# Altium PCB helix_4_multi_shield_host.PcbDoc (part 1 of 3)
Units mm, origin at the board's own origin, x right, y up, seen from the top; angles counter-clockwise.
Board outline 150 x 170 mm, 2 copper layers (Top Layer, Bottom Layer); 120 components, 166 nets, 674 pads, 2020 vias.
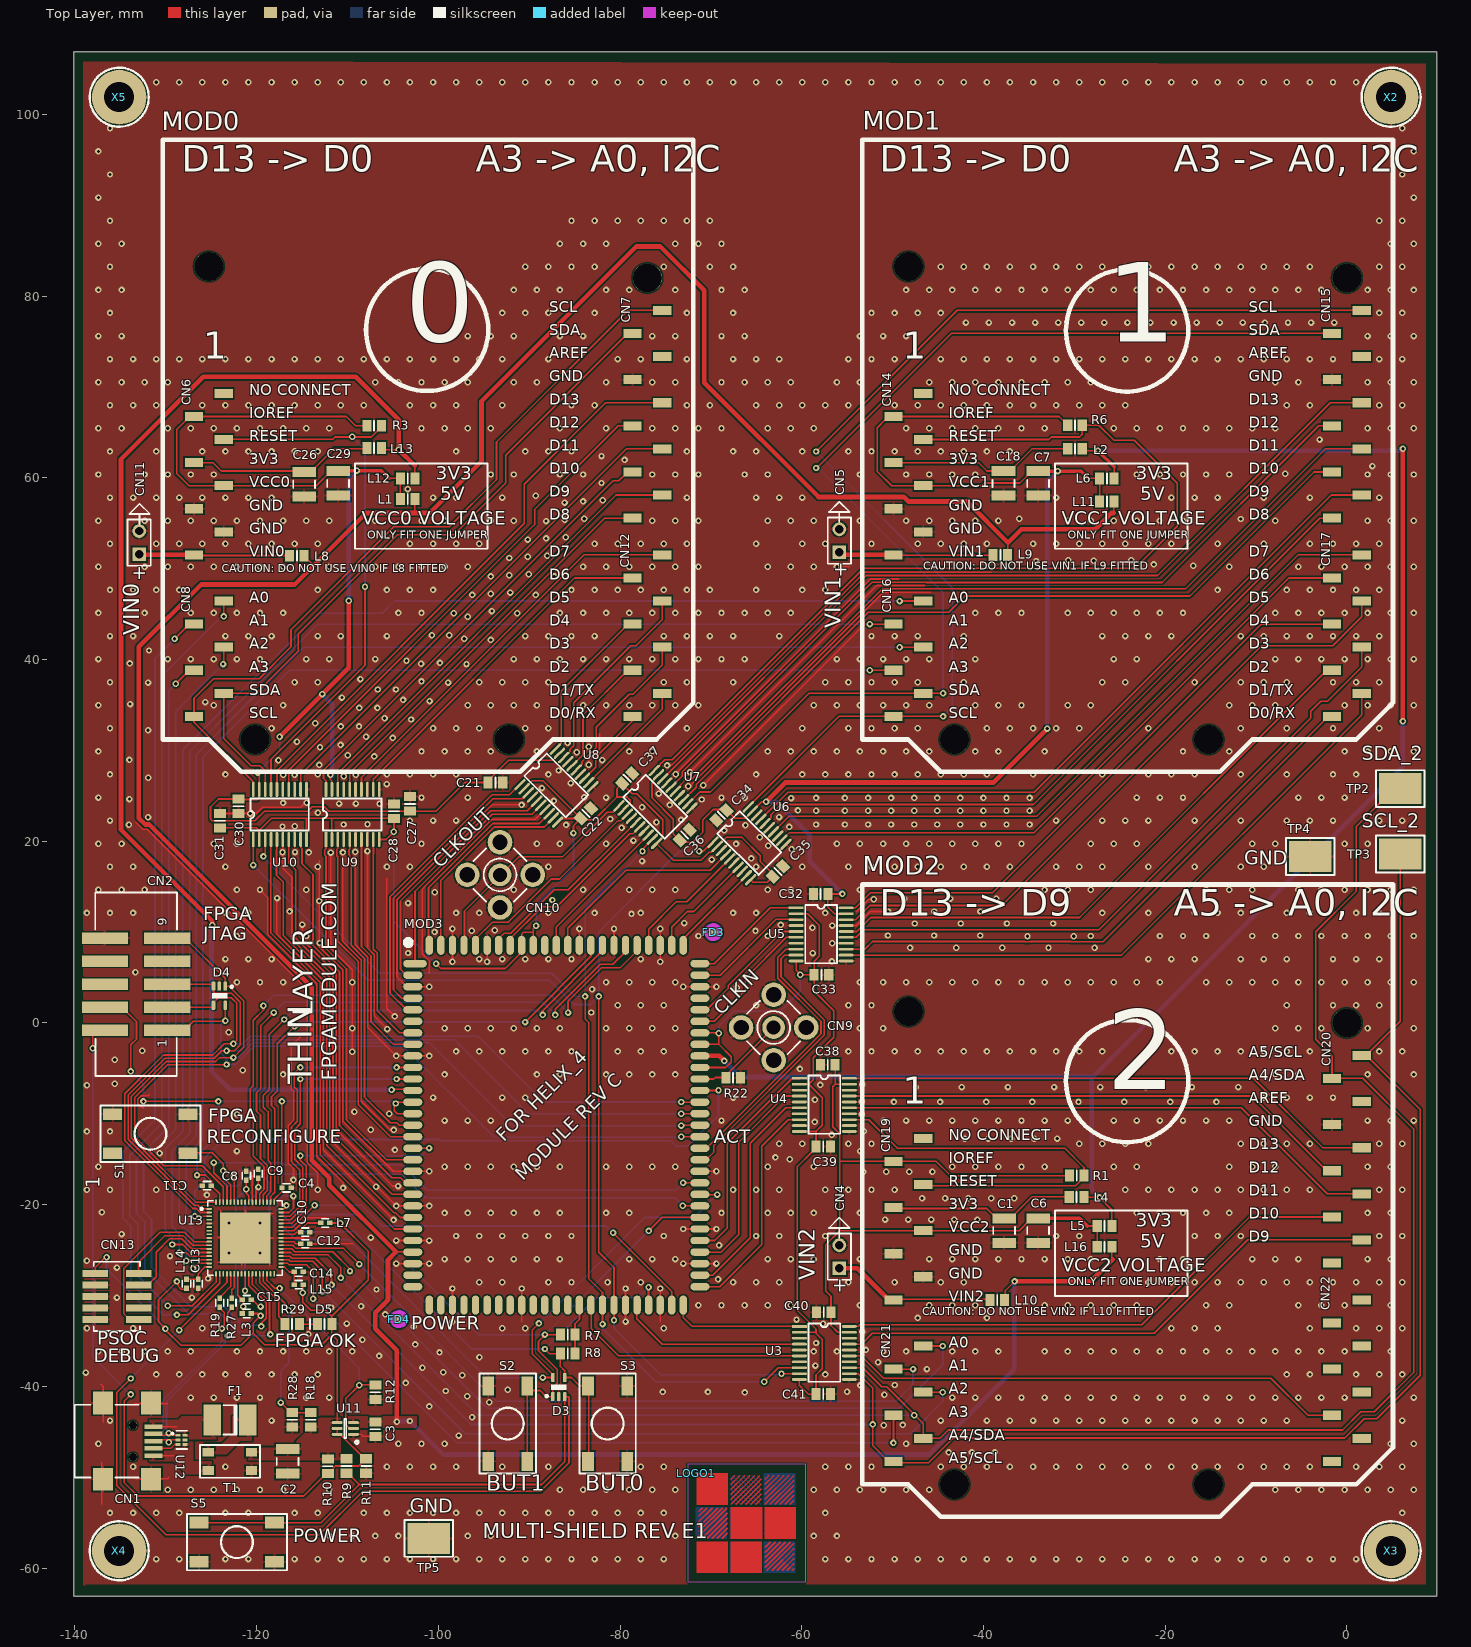
[diagram p0: Top Layer view]
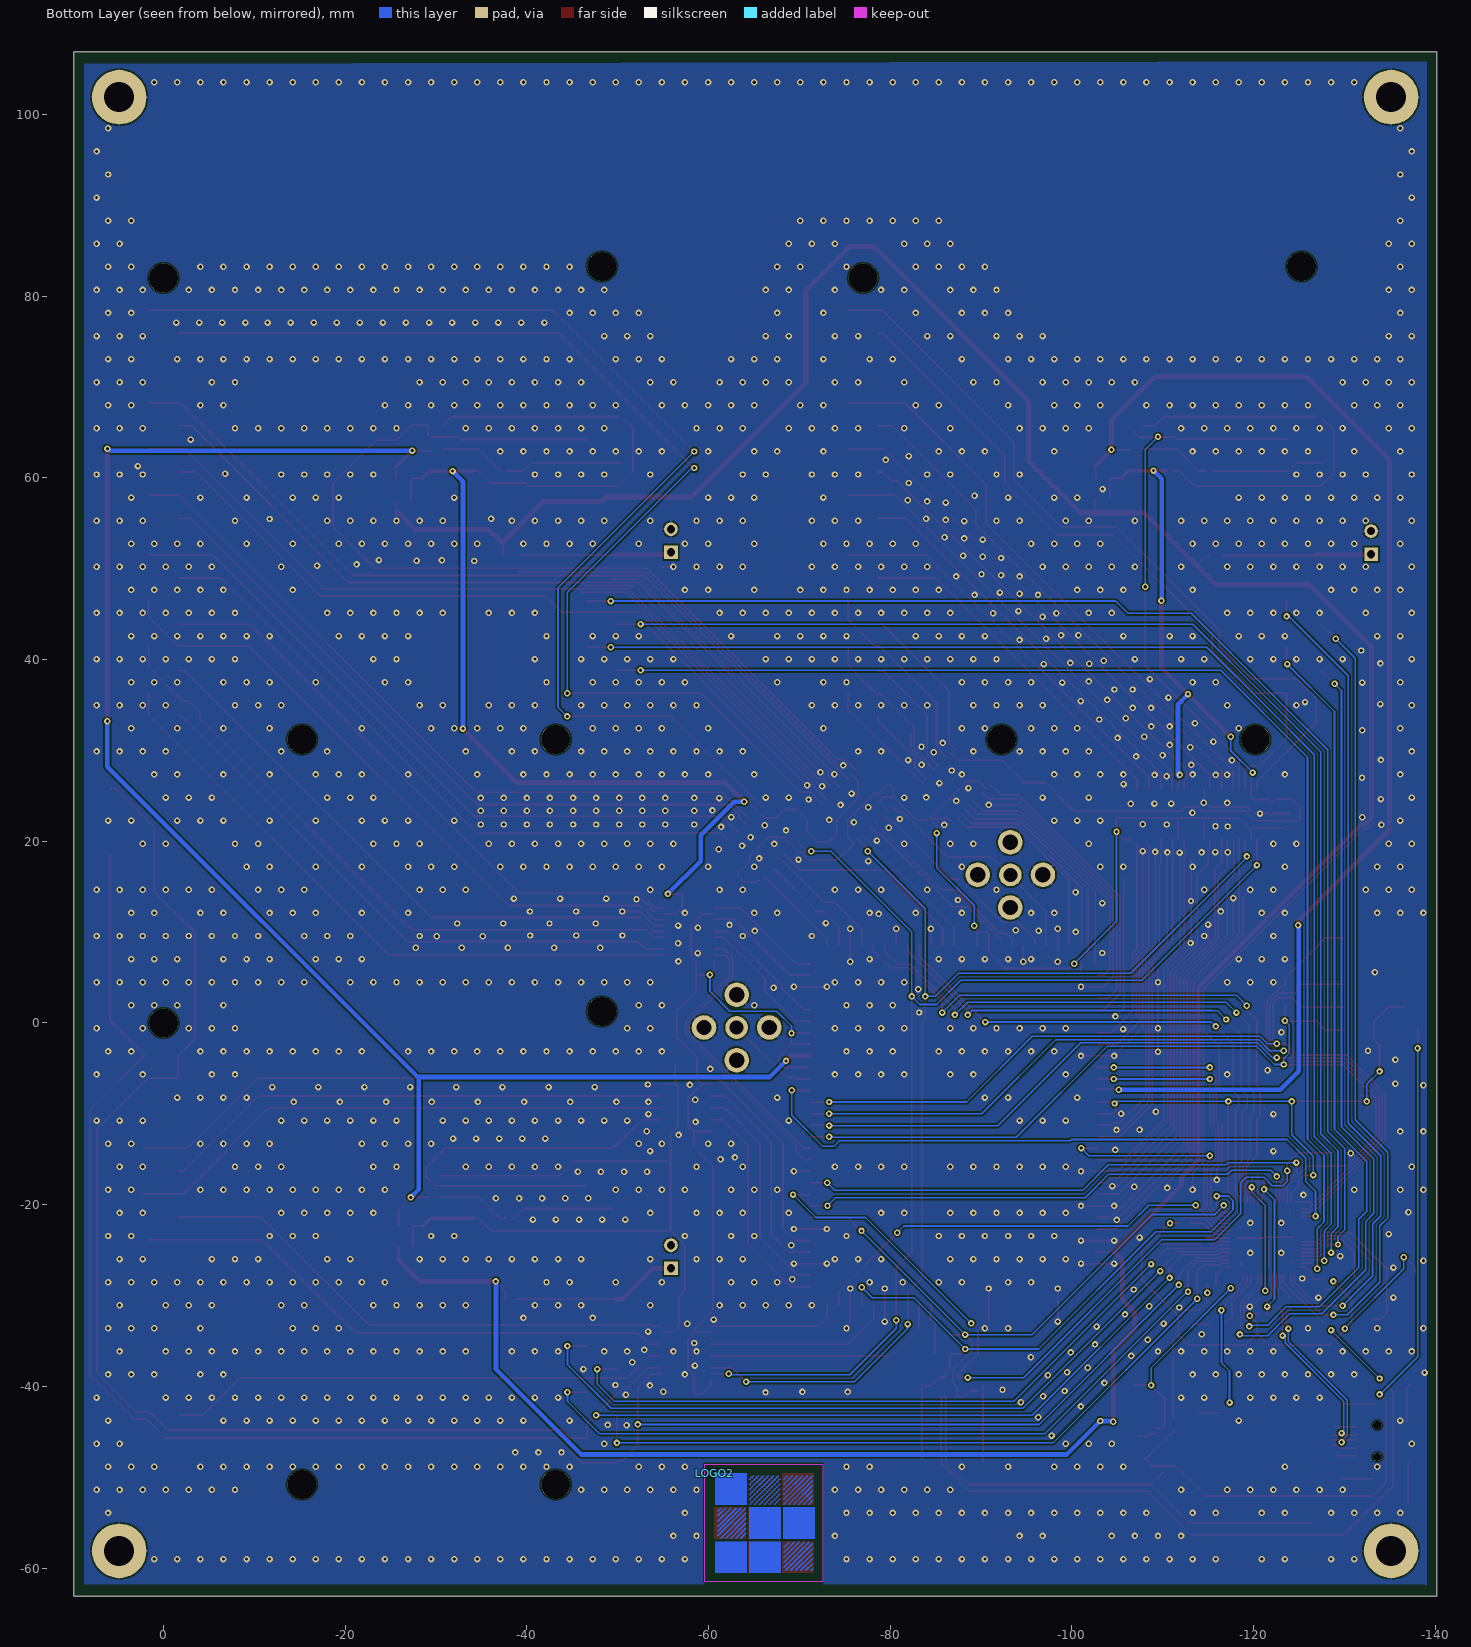
[diagram p1: Bottom Layer view, seen from below]

## Layer stack, top to bottom
Top Layer: signal copper 0.0356
Dielectric: core 0.32, FR-4, Dk 4.8
Bottom Layer: signal copper 0.0356

## Board outline
-140.13,-63.1 9.87,-63.1 9.87,106.9 -140.13,106.9

## Design rules (kind name [scope] priority, off if disabled: settings)
Clearance [All] p1: gap=0.178
HoleSize [All] p1: absolutevalues=TRUE maxlimit=25.4 minlimit=0.356 maxpercent=80.000 minpercent=20.000
PolygonConnect PolygonConnect_1 [All vs IsVia] p1: connectstyle=Direct reliefconductorwidth=0.254 reliefentries=4 polygonreliefangle="90 Angle"
PolygonConnect [All] p2: connectstyle=Relief reliefconductorwidth=0.254 reliefentries=4 polygonreliefangle="90 Angle"
RoutingVias [All] p1: holewidth=0.356 width=0.711 viastyle="Through Hole" minholewidth=0.356 minwidth=0.711 maxholewidth=0.711 maxwidth=1.27
SilkscreenOverComponentPads [All] p1: minsilkscreentomaskgap=0.254
SolderMaskExpansion [All] p1: expansion=0.102
Width [All] p1: maxlimit=2.032 minlimit=0.178 preferedwidth=0.178 minimp=50.000000 maximp=50.000000 favimp=50.000000
26 further rules are at their usual default settings.

## Components (designator, comment, footprint, x,y, rotation, side; value= is the part's Value field where it differs from the comment)
C1 "100uF" 1210 -37.727,-22.85 r270 top
C2 "100uF" 1210 -116.586,-48.26 r270 top
C3 "10uF" 0805 -106.934,-44.704 r270 top
C4 "1uF" 0402_HD -116.713,-18.161 r180 top
C6 "100uF" 1210 -33.977,-22.85 r270 top
C7 "100uF" 1210 -33.973,59.4 r270 top
C8 "1uF" 0402_HD -121.142,-16.809 r90 top
C9 "1uF" 0402_HD -119.822,-16.612 r270 top
C10 "1uF" 0402_HD -114.665,-23.032 r0 top
C11 "1uF" 0402_HD -125.476,-17.907 r0 top
C12 "1uF" 0402_HD -114.665,-24.302 r0 top
C13 "1uF" 0402_HD -126.452,-28.721 r90 top
C14 "1uF" 0402_HD -115.377,-27.407 r180 top
C15 "1uF" 0402_HD -121.092,-30.455 r0 top
C18 "100uF" 1210 -37.798,59.4 r270 top
C21 "1uF" 0805 -93.716,26.462 r180 top
C22 "1uF" 0805 -83.766,23.075 r225 top
C26 "100uF" 1210 -114.777,59.3 r270 top
C27 "1uF" 0805 -103.116,24.112 r270 top
C28 "1uF" 0805 -104.88,23.312 r270 top
C29 "100uF" 1210 -111.027,59.4 r270 top
C30 "1uF" 0805 -122.005,23.85 r90 top
C31 "1uF" 0805 -124.026,22.25 r270 top
C32 "1uF" 0805 -57.93,14.2 r0 top
C33 "1uF" 0805 -57.83,5.3 r180 top
C34 "1uF" 0805 -68.847,22.87 r45 top
C35 "1uF" 0805 -62.63,16.682 r225 top
C36 "1uF" 0805 -72.88,20.682 r225 top
C37 "1uF" 0805 -79.216,26.922 r225 top
C38 "1uF" 0805 -57.13,-4.6 r0 top
C39 "1uF" 0805 -57.63,-13.6 r180 top
C40 "1uF" 0805 -57.58,-31.85 r0 top
C41 "1uF" 0805 -57.63,-40.85 r180 top
CN1 "Header 5" USB_MINI_B -131.361,-46.031 r270 top
CN2 "Altera JTAG 2x5 Header" BOXHDR2X5_SMT -133.274,-0.813 r90 top
CN4 "Header 2" HDR1X2 -55.866,-27 r90 top
CN5 "Header 2" HDR1X2 -55.866,51.81 r90 top
CN6 "UNO_SHIELD_POWER" UNO_SHIELD_POWER -123.62,69.3 r0 top
CN7 "UNO_SHIELD_DH" UNO_SHIELD_DH -78.64,55.584 r0 top
CN8 "UNO_SHIELD_ANALOG" UNO_SHIELD_ANALOG -123.62,46.44 r0 top locked
CN9 "Header 2" SMA_V -63.091,-0.5 r45 top
CN10 "Header 2" SMA_V -93.216,16.3 r135 top
CN11 "Header 2" HDR1X2 -132.93,51.6 r90 top
CN12 "UNO_SHIELD_DL" UNO_SHIELD_DL -78.64,33.74 r0 top
CN13 "Header Keyed 50mil SMD" SBH41_127_10W_DUAL -135.382,-30.099 r270 top
CN14 "UNO_SHIELD_POWER" UNO_SHIELD_POWER -46.62,69.3 r0 top
CN15 "UNO_SHIELD_DH" UNO_SHIELD_DH -1.64,55.584 r0 top
CN16 "UNO_SHIELD_ANALOG" UNO_SHIELD_ANALOG -46.62,46.44 r0 top
CN17 "UNO_SHIELD_DL" UNO_SHIELD_DL -1.64,33.74 r0 top
CN19 "UNO_SHIELD_POWER" UNO_SHIELD_POWER -46.62,-12.7 r0 top
CN20 "UNO_SHIELD_DH" UNO_SHIELD_DH -1.64,-26.416 r0 top
CN21 "UNO_SHIELD_ANALOG" UNO_SHIELD_ANALOG -46.62,-35.56 r0 top locked
CN22 "UNO_SHIELD_DL" UNO_SHIELD_DL -1.64,-48.26 r0 top
D3 "CPDV5-3V3UP" sot-353 -86.741,-40.081 r90 top
D4 "CPDV5-3V3UP" SOT-353 -124.104,2.997 r270 top
D5 "GREEN" 0805_HD_LED -112.522,-33.147 r0 top
F1 "0.75/1.5A PTC" 1812 -122.936,-43.688 r180 top
FD3 "1MM FIDUCIAL MARK" FID_1MM -69.741,10 r90 top
FD4 "1MM FIDUCIAL MARK" FID_1MM -104.341,-32.6 r90 top
L1 "FERRITE" 0805 -103.378,57.658 r180 top
L2 "FERRITE" 0805 -29.923,63.2 r180 top
L3 "FERRITE" 0402_HD -121.092,-31.979 r180 top
L4 "FERRITE" 0805 -29.752,-19.15 r180 top
L5 "NO FIT" 0805 -26.67,-22.352 r180 top
L6 "NO FIT" 0805 -26.416,59.944 r180 top
L7 "FERRITE" 0402_HD -112.442,-22.016 r0 top
L8 "FERRITE" 0805 -115.57,51.435 r180 top
L9 "FERRITE" 0805 -38.141,51.5 r180 top
L10 "FERRITE" 0805 -38.481,-30.48 r180 top
L11 "FERRITE" 0805 -26.416,57.404 r180 top
L12 "NO FIT" 0805 -103.378,59.944 r180 top
L13 "FERRITE" 0805 -107.077,63.3 r180 top
L14 "FERRITE" 0402_HD -127.722,-28.721 r270 top
L15 "FERRITE" 0402_HD -115.377,-28.804 r0 top
L16 "FERRITE" 0805 -26.67,-24.638 r180 top
LOGO1 "LOGO" LOGO_LARGE -71.608,-49.557 r0 top
LOGO2 "LOGO" LOGO_LARGE -60.71,-49.557 r180 bottom
MOD0 "UNO SHIELD" UNO_SHIELD_MECH -123.62,69.3 r0 top locked
MOD1 "UNO SHIELD" UNO_SHIELD_MECH -46.62,69.3 r0 top locked
MOD2 "UNO SHIELD" UNO_SHIELD_MECH -46.62,-12.7 r0 top locked
MOD3 "helix_4" HELIX_4_LCC104_HOST -87.016,-11.25 r0 top
R1 "100K" 0805 -29.727,-16.8 r180 top
R3 "100K" 0805 -107.077,65.744 r180 top
R6 "100K" 0805 -29.923,65.8 r180 top
R7 "100K" 0805 -85.766,-34.3 r180 top
R8 "100K" 0805 -85.766,-36.4 r180 top
R9 "100K" 0805 -110.109,-48.768 r270 top
R10 "100K" 0805 -112.158,-48.801 r90 top
R11 "DO NOT FIT" 0805 -107.95,-48.768 r90 top
R12 "10K" 0805 -106.934,-40.64 r90 top
R18 "100K" 0805 -114.046,-43.688 r90 top
R19 "24R" 0402_HD -124.063,-30.779 r270 top
R22 "50R" 0805 -67.555,-6.025 r180 top
R27 "24R" 0402_HD -122.729,-30.779 r270 top
R28 "100K" 0805 -116.078,-43.688 r270 top
R29 "330R" 0805 -116.101,-33.147 r180 top
S1 "SW-PB" FSM4JSMA -131.699,-12.192 r270 top
S2 "SW-PB" FSM4JSMA -92.366,-44.1 r0 top
S3 "SW-PB" FSM4JSMA -81.366,-44.1 r180 top
S5 "SW-PB" FSM4JSMA -122.174,-57.15 r90 top
T1 "TDK ACM45" TDK_ACM45 -122.936,-48.26 r0 top
TP2 "Test Point" TEST_POINT#1 5.87,25.79 r180 top
TP3 "Test Point" TEST_POINT#1 5.87,18.6 r180 top
TP4 "Test Point" TEST_POINT#2 -4.025,18.325 r0 top
TP5 "Test Point" TEST_POINT#2 -101.053,-56.732 r0 top (schematic designator TP4)
U3 "TXB0108" TSSOP20 -60.266,-33.4 r0 top
U4 "TXB0108" TSSOP20 -60.266,-6.096 r0 top
U5 "TXB0108" TSSOP20 -60.616,12.67 r0 top
U6 "TXB0108" TSSOP20 -69.766,19.9 r45 top
U7 "TXB0108" TSSOP20 -80.116,23.9 r45 top
U8 "TXB0108" TSSOP20 -91.016,26.25 r45 top
U9 "TXB0108" TSSOP20 -112.366,20.2 r90 top
U10 "TXB0108" TSSOP20 -120.366,20.2 r90 top
U11 "MOSFET P/N" WSMini6-F1-B -110.244,-44.638 r180 top
U12 "SN65220 USB TVS SOT23-6_0" DRY6 -128.661,-45.396 r270 top
U13 "CY8C5467-LP003_QFN68" PSOC_QFN68_HD -121.269,-23.667 r0 top
X2 "M2 Mounting Hole" Mounting_Hole_M3 4.87,101.9 r0 top
X3 "M2 Mounting Hole" Mounting_Hole_M3 4.87,-58.1 r0 top
X4 "M2 Mounting Hole" Mounting_Hole_M3 -135.13,-58.1 r0 top
X5 "M2 Mounting Hole" Mounting_Hole_M3 -135.13,101.9 r0 top

## Footprints (in the part's own frame and the unit in brackets; to place one, negate y for a bottom-side part, rotate by r counter-clockwise, add the part's x,y. Pads: shape width x height; smd on the part's side, far side on the other; paste and mask are expansions set on the pad)
0402_HD [mm]
  rect 0.6x0.5 smd: 1(-0.5,0) 2(0.5,0)
  silkscreen extent -0.38,-0.46 0.38,0.46
0805 [mm] "Chip Resistor, Body 2.0x1.3mm, IPC High Density"
  rect 1x1.3 smd: 1(-0.8,0) 2(0.8,0)
  silkscreen extent 0,-0.55 0,0.55, body extent -1.07,-0.7 1.07,0.7, height 0.65
0805_HD_LED [mm] "Chip Resistor, Body 2.0x1.3mm, IPC High Density"
  rect 1x1.3 smd: A(0.8,0) K(-0.8,0)
  silkscreen extent -1.6,-0.55 0,0.55, body extent -1.07,-0.7 1.07,0.7, height 0.65
1210 [mm] "Chip Resistor, Body 3.2x2.5mm, IPC High Density"
  rect 1.1x2.6 smd: 1(-1.35,0) 2(1.35,0)
  silkscreen extent -0.4,-1.2 0.4,1.2, body extent -1.68,-1.32 1.68,1.32, height 0.71
1812 [mm] "Chip Capacitor; Body 4.5 x 3.2 mm (LxW typ)"
  rect 1.9x3.4 smd: 1(-1.95,0) 2(1.95,0)
  silkscreen extent -0.7,-1.6 0.7,1.6
BOXHDR2X5_SMT [mm] "Connector; Header; 5x2 Position"
  rect 1.27x5.08 smd: 1(0,-3.43) 2(0,3.43) 3(2.54,-3.43) 4(2.54,3.43) 5(5.08,-3.43) 6(5.08,3.43) 7(7.62,-3.43) 8(7.62,3.43) 9(10.16,-3.43) 10(10.16,3.43)
  silkscreen extent -5.02,-4.5 15.18,4.5
DRY6 [mm]
  rect 0.3x0.52 smd paste-0.015 mask+0.05: 1(0,0) 2(0.5,0) 3(1,0) 4(1,0.78) 5(0.5,0.78) 6(0,0.78)
  silkscreen extent -0.5,-0.7 1.5,1
FID_1MM [mm]
  round 1 smd paste+0 mask+0: 0(0,0)
  Top Layer keep-out circle w0.5: c0,0 r0.75
  Top Solder keep-out circle w0.5: c0,0 r0.75
FSM4JSMA [mm] "Push Button Switch"
  rect 1.3x2.1 smd: 1(-2.15,4.15) 1(-2.15,-4.15) 2(2.15,4.15) 2(2.15,-4.15)
  silkscreen extent -3.1,-5.5 3.1,5.5
HDR1X2 [mm] "Connector; Header; 2 Position"
  rect 1.5x1.5 hole 0.9: 1(0,0)
  round 1.5 hole 0.9: 2(2.54,0)
  silkscreen extent -1.27,-1.27 3.81,1.27
HELIX_4_LCC104_HOST [mm] "Module socket 32x40mm"
  oval 2.6x0.813 smd: 1(-15.55,17.78)
  oval 2.1x0.813 smd: 2(-15.8,16.51) 3(-15.8,15.24) 4(-15.8,13.97) 5(-15.8,12.7) 6(-15.8,11.43) 7(-15.8,10.16) 8(-15.8,8.89) 9(-15.8,7.62) 10(-15.8,6.35) 11(-15.8,5.08) 12(-15.8,3.81) 13(-15.8,2.54) 14(-15.8,1.27) 15(-15.8,0) 16(-15.8,-1.27) 17(-15.8,-2.54) 18(-15.8,-3.81) 19(-15.8,-5.08) 20(-15.8,-6.35) 21(-15.8,-7.62) 22(-15.8,-8.89) 23(-15.8,-10.16) 24(-15.8,-11.43) 25(-15.8,-12.7) 26(-15.8,-13.97) 27(-15.8,-15.24) 28(-15.8,-16.51) 29(-15.8,-17.78) 53(15.8,-17.78) 54(15.8,-16.51) 55(15.8,-15.24) 56(15.8,-13.97) 57(15.8,-12.7) 58(15.8,-11.43) 59(15.8,-10.16) 60(15.8,-8.89) 61(15.8,-7.62) 62(15.8,-6.35) 63(15.8,-5.08) 64(15.8,-3.81) 65(15.8,-2.54) 66(15.8,-1.27) 67(15.8,0) 68(15.8,1.27) 69(15.8,2.54) 70(15.8,3.81) 71(15.8,5.08) 72(15.8,6.35) 73(15.8,7.62) 74(15.8,8.89) 75(15.8,10.16) 76(15.8,11.43) 77(15.8,12.7) 78(15.8,13.97) 79(15.8,15.24) 80(15.8,16.51) 81(15.8,17.78)
  oval 0.813x2.1 smd: 30(-13.97,-19.8) 31(-12.7,-19.8) 32(-11.43,-19.8) 33(-10.16,-19.8) 34(-8.89,-19.8) 35(-7.62,-19.8) 36(-6.35,-19.8) 37(-5.08,-19.8) 38(-3.81,-19.8) 39(-2.54,-19.8) 40(-1.27,-19.8) 41(0,-19.8) 42(1.27,-19.8) 43(2.54,-19.8) 44(3.81,-19.8) 45(5.08,-19.8) 46(6.35,-19.8) 47(7.62,-19.8) 48(8.89,-19.8) 49(10.16,-19.8) 50(11.43,-19.8) 51(12.7,-19.8) 52(13.97,-19.8) 82(13.97,19.8) 83(12.7,19.8) 84(11.43,19.8) 85(10.16,19.8) 86(8.89,19.8) 87(7.62,19.8) 88(6.35,19.8) 89(5.08,19.8) 90(3.81,19.8) 91(2.54,19.8) 92(1.27,19.8) 93(0,19.8) 94(-1.27,19.8) 95(-2.54,19.8) 96(-3.81,19.8) 97(-5.08,19.8) 98(-6.35,19.8) 99(-7.62,19.8) 100(-8.89,19.8) 101(-10.16,19.8) 102(-11.43,19.8) 103(-12.7,19.8) 104(-13.97,19.8)
  silkscreen extent -16.6,19.8 -16,20.4
LOGO_LARGE [mm]
  Top Layer region: 0,-11 3.5,-11 3.5,-7.5 0,-7.5
  Top Layer region: 3.75,-11 7.25,-11 7.25,-7.5 3.75,-7.5
  Top Layer region: 7.5,-7.25 11,-7.25 11,-3.75 7.5,-3.75
  Top Layer region: 3.77,-7.25 7.27,-7.25 7.27,-3.75 3.77,-3.75
  Top Layer region: 0,-3.5 3.5,-3.5 3.5,0 0,0
  Top Layer lines w0.178: 0.3,-6.9 3.35,-3.85 ; 0.3,-6.4 2.85,-3.85 ; 0.3,-5.9 2.35,-3.85 ; 0.3,-5.3 1.75,-3.85 ; 0.3,-4.7 1.15,-3.85 ; 0.3,-4.2 0.65,-3.85 ; 0.65,-7.15 3.4,-4.4 ; 1.2,-7.15 3.4,-4.95 ; 1.75,-7.15 3.4,-5.5 ; 2.3,-7.15 3.4,-6.05 ; 2.85,-7.15 3.4,-6.6 ; 3.85,-3.4 6.95,-0.3 ; 3.85,-2.85 6.4,-0.3 ; 3.85,-2.3 5.85,-0.3 ; 3.85,-1.75 5.3,-0.3 ; 3.85,-1.2 4.75,-0.3 ; 3.85,-0.65 4.2,-0.3 ; 4.4,-3.4 7.15,-0.65 ; 4.95,-3.4 7.15,-1.2 ; 5.5,-3.4 7.15,-1.75 ; 6.05,-3.4 7.15,-2.3 ; 6.6,-3.4 7.15,-2.85 ; 7.6,-10.35 10.35,-7.6 ; 7.6,-9.8 9.8,-7.6 ; 7.6,-9.25 9.25,-7.6 ; 7.6,-8.7 8.7,-7.6 ; 7.6,-8.15 8.15,-7.6 ; 7.6,-3.4 10.7,-0.3 ; 7.6,-2.85 10.15,-0.3 ; 7.6,-2.3 9.6,-0.3 ; 7.6,-1.75 9.05,-0.3 ; 7.6,-1.2 8.5,-0.3 ; 7.6,-0.65 7.95,-0.3 ; 7.775,-10.7 10.7,-7.775 ; 8.15,-3.4 10.7,-0.85 ; 8.35,-10.7 10.7,-8.35 ; 8.7,-3.4 10.7,-1.4 ; 8.9,-10.7 10.7,-8.9 ; 9.25,-3.4 10.7,-1.95 ; 9.45,-10.7 10.7,-9.45 ; 9.8,-3.4 10.7,-2.5 ; 10,-10.7 10.7,-10 ; 10.35,-3.4 10.7,-3.05 ; 10.55,-10.7 10.7,-10.55
Mounting_Hole_M3 [mm] "Hole for M3 Screw"
  round 6 hole 3.3: 1(0,0)
  silkscreen extent -3.25,-3.25 3.25,3.25
PSOC_QFN68_HD [mm] "QFN, 68-Leads, Body 8.1x8.1mm (max), Pitch 0.40mm, IPC High Density"
  oval 0.6x0.2 smd: 1(-3.95,3.2) 2(-3.95,2.8) 3(-3.95,2.4) 4(-3.95,2) 5(-3.95,1.6) 6(-3.95,1.2) 7(-3.95,0.8) 8(-3.95,0.4) 9(-3.95,0) 10(-3.95,-0.4) 11(-3.95,-0.8) 12(-3.95,-1.2) 13(-3.95,-1.6) 14(-3.95,-2) 15(-3.95,-2.4) 16(-3.95,-2.8) 17(-3.95,-3.2) 35(3.95,-3.2) 36(3.95,-2.8) 37(3.95,-2.4) 38(3.95,-2) 39(3.95,-1.6) 40(3.95,-1.2) 41(3.95,-0.8) 42(3.95,-0.4) 43(3.95,0) 44(3.95,0.4) 45(3.95,0.8) 46(3.95,1.2) 47(3.95,1.6) 48(3.95,2) 49(3.95,2.4) 50(3.95,2.8) 51(3.95,3.2)
  oval 0.2x0.6 smd: 18(-3.2,-3.95) 19(-2.8,-3.95) 20(-2.4,-3.95) 21(-2,-3.95) 22(-1.6,-3.95) 23(-1.2,-3.95) 24(-0.8,-3.95) 25(-0.4,-3.95) 26(0,-3.95) 27(0.4,-3.95) 28(0.8,-3.95) 29(1.2,-3.95) 30(1.6,-3.95) 31(2,-3.95) 32(2.4,-3.95) 33(2.8,-3.95) 34(3.2,-3.95) 52(3.2,3.95) 53(2.8,3.95) 54(2.4,3.95) 55(2,3.95) 56(1.6,3.95) 57(1.2,3.95) 58(0.8,3.95) 59(0.4,3.95) 60(0,3.95) 61(-0.4,3.95) 62(-0.8,3.95) 63(-1.2,3.95) 64(-1.6,3.95) 65(-2,3.95) 66(-2.4,3.95) 67(-2.8,3.95) 68(-3.2,3.95)
  rect 5.588x5.588 smd: 69(0,0)
  silkscreen extent -4.92,-4.1 4.1,4.1, body extent -4.05,-4.05 4.05,4.05, height 1
SBH41_127_10W_DUAL [mm] "SBH41_NBPB_Dxx"
  rect 0.76x2.8 smd: 1(-2.54,-2.4) 2(-2.54,2.4) 3(-1.27,-2.4) 4(-1.27,2.4) 5(0,-2.4) 6(0,2.4) 7(1.27,-2.4) 8(1.27,2.4) 9(2.54,-2.4) 10(2.54,2.4)
  silkscreen extent -3.81,-2.54 3.81,2.54
SMA_V [mm] "Connector; SMB Straight"
  round 2.5 hole 1.54: 1(0,0)
  round 2.7 hole 1.7: 2(-2.54,-2.54) 2(-2.54,2.54) 2(2.54,2.54) 2(2.54,-2.54)
  silkscreen extent -3.15,-3.15 3.15,3.15
sot-353 [mm] "Small outline 2.1mm L x 1.25mm W x 1mm H; 5LD SC-70; SC-88A"
  round 0.5 on Mech14: 0(0,0)
  rrect50% 1x0.4 smd: 1(-1.05,0.65) 2(-1.05,0) 3(-1.05,-0.65) 4(1.05,-0.65) 5(1.05,0.65)
  silkscreen extent -1.1,-0.85 0.3,1.45, body extent -1.2,-1.1 1.2,1.1, height 1.1
SOT-353 [mm] "Small outline 2.1mm L x 1.25mm W x 1mm H; 5LD SC-70; SC-88A"
  round 0.5 on Mech14: 0(0,0)
  rrect50% 1x0.4 smd: 1(-1.05,0.65) 2(-1.05,0) 3(-1.05,-0.65) 4(1.05,-0.65) 5(1.05,0.65)
  silkscreen extent -1.1,-0.83 0.3,1.45, body extent -1.2,-1.1 1.2,1.1, height 1.1
TDK_ACM45 [mm] "TDK 8A Common Mode Choke"
  rect 1.25x0.95 smd: 1(-2.375,1) 2(2.375,1) 3(-2.375,-1) 4(2.375,-1)
  silkscreen extent -3.3,-1.8 3.3,1.8
TEST_POINT#1 [mm]
  rect 4.7x3.43 smd: 1(0,0)
  silkscreen extent -2.67,-2.03 2.67,2.03
TEST_POINT#2 [mm]
  rect 4.7x3.43 smd paste-3: 1(0,0)
  silkscreen extent -2.67,-2.03 2.67,2.03
TSSOP20 [mm]
  rect 1.65x0.3 smd: 1(0,0)
  oval 1.65x0.3 smd: 2(0,-0.65) 3(0,-1.3) 4(0,-1.95) 5(0,-2.6) 6(0,-3.25) 7(0,-3.9) 8(0,-4.55) 9(0,-5.2) 10(0,-5.85) 11(5.5,-5.85) 12(5.5,-5.2) 13(5.5,-4.55) 14(5.5,-3.9) 15(5.5,-3.25) 16(5.5,-2.6) 17(5.5,-1.95) 18(5.5,-1.3) 19(5.5,-0.65) 20(5.5,0)
  silkscreen extent 1,-6.1 4.5,0.33
UNO_SHIELD_ANALOG [mm]
  rect 2x1 smd: 9(0,0) 10(-3.28,-2.54) 11(0,-5.08) 12(-3.28,-7.62) 13(0,-10.16) 14(-3.28,-12.7)
UNO_SHIELD_DH [mm]
  rect 2x1 smd: 29(0,-0.016) 30(3.28,2.524) 31(0,5.064) 32(3.28,7.604) 33(0,10.144) 34(3.28,12.684) 35(0,15.224) 36(3.28,17.764) 37(0,20.304) 38(3.28,22.844)
UNO_SHIELD_DL [mm]
  rect 2x1 smd: 21(0,0) 22(3.28,2.54) 23(0,5.08) 24(3.28,7.62) 25(0,10.16) 26(3.28,12.7) 27(0,15.24) 28(3.28,17.78)
UNO_SHIELD_MECH [mm]
  round 3.175 hole 3.175 unplated: 0(-1.64,13.97) 0(3.44,-38.1) 0(31.38,-38.1) 0(46.62,12.7)
  silkscreen extent -6.72,-41.66 51.7,27.94
UNO_SHIELD_POWER [mm]
  rect 2x1 smd: 1(0,0) 2(-3.28,-2.54) 3(0,-5.08) 4(-3.28,-7.62) 5(0,-10.16) 6(-3.28,-12.7) 7(0,-15.24) 8(-3.28,-17.78)
USB_MINI_B [mm]
  rect 2.5x2.2 smd: 0(-4.2,-0.25) 0(-4.2,-5.55) 0(4.2,-0.25) 0(4.2,-5.55)
  round 0.9 hole 0.9 unplated: 0(-1.75,-2.25) 0(1.75,-2.25)
  rect 0.5x2 smd: 1(-1.6,0) 2(-0.8,0) 3(0,0) 4(0.8,0) 5(1.6,0)
  silkscreen extent -4,-8.65 4,-1.6
WSMini6-F1-B [mm] "For Panasonic MTM763200LBF"
  oval 1.2x0.35 smd: D1(0.9,0.65) D2(-0.9,-0.65) G1(-0.9,0) G2(0.9,0) S1(-0.9,0.65) S2(0.9,-0.65)
  silkscreen extent -1.45,-1.05 0.1,1.67, body extent -0.9,-1.05 0.9,1.05, height 0.7

## Part data
C1 C2 C3 C6 C7 C18 C21 C22 C26 C27 C28 C29 C30 C31 C32 C33 C34 C35 C36 C37 C38 C39 C40 C41: library part CAP, "Capacitor"
C4 C9 C11 C12 C13 C14: library part CAP, "CAP CER 1.2 uF 10 V 10% X5R 0805 SMD"
C8 C10: library part CAP, "CAP, CER, 10 uF, 16 V, 5%, X5R, 0805, SMD"
C15: library part CAP, "CAP, CER, 1.0 uF, 10 V, 10%, X5R, 0603, SMD"
CN1: "Header, 5-Pin"
CN2: "Header, 5-Pin, Dual row"
CN4 CN5 CN9 CN10 CN11: "Header, 2-Pin"
CN13: library part HDR_2X5, "CONN, HDR, KEYED, 2x5, 0.050\", Gold, SMD"
D3: library part "4CH ESD DIODE (SPLIT)", "4CH ESD DIODE 3V3/3.5V"
D4: library part "4CH ESD DIODE", "4CH ESD DIODE 3V3/3.5V"
D5: library part LED
F1: library part "Fuse 2", "Fuse"
FD3 FD4 LOGO1 LOGO2: library part FID
L5 L6 L12: library part FERRITE, "FERRITE"
MOD0 MOD1 MOD2: library part UNO_SHIELD_MECH
MOD3: library part "helix_4 Rev C Module"
R1 R3 R6 R7 R8 R9 R10 R11 R12 R18 R19 R22 R27 R28 R29: library part RES1
S1 S2 S3 S5: "Switch"
T1: library part "Trans Ideal", "Transformer (Ideal)"
U3 U4 U5 U6 U7 U8 U9 U10: "TI Bir-dir buffer"
U11: library part PN_PAIR
U13: library part CY8C38XX_100P_ALT, "IC, PSoC3"
X2 X3 X4 X5: library part Mounting_Hole_M2, "Hole for M3 Screw"

## Via types
v1: diameter 0.711, hole 0.356, Top Layer to Bottom Layer, tented both sides, 2016 vias
v2: diameter 0.711, hole 0.356, Top Layer to Bottom Layer, tented top, 4 vias

## Nets (pads, with @x,y where several pads share a name; then routed paths per layer and width w, separated by ;. In a path a pad name is that pad's centre, name@x,y a point inside that pad or via, vN(x,y) a via of type N, cw(c..) or ccw(c..) an arc to the next point about the centre after c; other vN are vias at no path point)
2V5_BOT: C22.2 C28.2 C31.2 C35.2 C37.2 MOD3.95 MOD3.96 U6.2 U6.10 U7.2 U7.10 U8.2 U8.10 U9.2 U9.10 U10.2 U10.10 | length 124.1
  Top Layer w0.178: C31.2@-123.48,21.5 -120.03,21.5 -119.716,21.186 ; U10.2@-119.716,20.2 -119.716,21.186 ; U10.10@-114.516,20.2 -114.516,22.475 ; U9.2@-111.716,20.2 -111.716,22.512 ; U9.10@-106.516,20.2 -105.73,20.2 -104.88,21.05 C28.2@-104.88,22.512 -111.716,22.512 ; v1(-100.255,6.53) -99.725,6 -92.63,6 -90.826,7.804 MOD3.96@-90.826,8.55 -90.826,9.789 -90.624,9.991 -89.605,9.991 -89.566,10.03 ; U8.2@-90.556,25.79 -89.697,26.65 -88.472,26.65 C22.2@-84.332,22.509 ; MOD3.95@-89.566,8.466 -89.566,10.03 ; v1(-89.241,10.7) -89.566,10.375 -89.566,10.03 ; U8.10@-86.879,22.113 -86.484,22.509 C22.2@-84.332,22.509 ; v1(-85.13,20.9) -85.13,21.711 C22.2@-84.332,22.509 ; C22.2@-84.176,22.353 -82.854,22.353 -80.34,24.867 ; U7.2@-79.656,23.44 -78.88,24.217 -78.88,24.515 -79.231,24.867 -80.34,24.867 ; U6.10@-65.629,15.763 -65.366,15.5 -63.813,15.5 C35.2@-63.196,16.117 -63.196,16.409 -64.554,17.767 -64.554,18.402 -66.573,20.422 -68.325,20.422 U6.2@-69.306,19.44 -69.961,18.785 -70.216,18.785 -71.102,17.9 -74.116,17.9 U7.10@-75.979,19.763 -75.308,20.435 -75.308,22.374 -78.171,25.237 -78.663,25.237 C37.2@-79.782,26.356 -80.34,25.797 -80.34,24.867 ; -119.716,21.186 -119.716,21.195 -118.399,22.512 -111.716,22.512
  Bottom Layer w0.178: v1(-104.905,21.05) -104.905,11.18 v1(-100.255,6.53) ; v1(-89.241,10.7) -89.241,12.948 -85.13,17.06 v1(-85.13,20.9)
2V5_LEFT: C33.2 C39.2 C41.2 MOD3.72 MOD3.74 MOD3.75 U3.2 U3.10 U4.2 U4.10 U5.2 U5.10 | length 94.6
  Top Layer w0.178: MOD3.74@-71.216,-2.36 -69.12,-2.36 ; MOD3.75@-71.216,-1.09 v1@-69.13,-1.09 ; MOD3.72@-70.832,-4.9 -68.355,-4.9 -67.766,-4.312 -67.766,-3.714 -69.12,-2.36 ; v1@-69.12,-1.125 -69.12,-2.36 ; U5.10@-60.616,6.82 -60.616,5.811 -60.105,5.3 C33.2@-58.63,5.3 ; U5.2@-60.616,12.02 -59.35,12.02 -58.064,10.734 -58.064,7.365 -58.63,6.8 C33.2@-58.63,5.3 ; U3.10@-60.266,-39.25 -60.266,-39.884 -59.3,-40.85 C41.2@-58.43,-40.85 -58.43,-38.745 -57.734,-38.049 -57.734,-34.849 -58.43,-34.153 -58.43,-33.696 -60.48,-31.646 -60.48,-15.801 -58.852,-14.173 C39.2@-58.852,-14.148 ; U3.2@-60.266,-34.05 -58.48,-34.05 -58.43,-34.1 ; U4.10@-60.266,-11.946 -58.447,-11.946 ; U4.2@-60.266,-6.746 -59.234,-6.746 ; C39.2@-58.43,-13.6 -58.43,-11.923 -57.76,-11.252 -57.76,-8.221 -59.234,-6.746 ; -59.234,-6.746 -58.735,-6.247 -58.735,-3.824 -56.494,-1.583 -56.494,1.339 -58.63,3.475 C33.2@-58.63,5.3
  Bottom Layer w0.178: v1(-69.13,-1.125) -69.13,-0.325 -67.505,1.3 -62.33,1.3 -60.155,3.475 v1(-60.155,5.3)
2V5_RIGHT: C4.2 C11.2 CN2.4 MOD3.13 MOD3.14 U13.52 U13.67 | length 71.8
  Top Layer w0.178: CN2.4@-136.704,1.727 -134.823,1.727 -133.223,0.127 -133.223,-1.778 -133.858,-2.413 v1(-133.858,-5.334) ; v1(-132.461,-8.636) v1(-124.206,-8.636) v1@-124.244,-8.598 ; v1(-126.568,-16.739) -125.628,-16.739 -124.976,-17.391 C11.2@-124.976,-17.907 -124.069,-18.814 U13.67@-124.069,-19.717 ; U13.52@-118.069,-19.717 -118.069,-19.39 -117.221,-18.542 -117.221,-8.941 v1@-116.916,-8.636 ; MOD3.14@-102.816,-9.98 -104.541,-9.98 -104.851,-9.67 -104.851,-9.095 -104.466,-8.71 MOD3.13@-102.816,-8.71
  Bottom Layer w0.178: v1(-133.858,-5.334) -132.461,-6.731 v1(-132.461,-8.636) ; v1(-126.568,-16.739) -126.568,-14.681 -124.206,-12.319 v1(-124.206,-8.636) v1(-117.221,-8.636) -104.927,-8.636 v1(-104.699,-8.865)
2V5_TOP: MOD3.43 R7.1 R8.1 | length 5.7
  Top Layer w0.178: R8.1@-84.966,-36.4 R7.1@-84.966,-34.3 -84.966,-33.1 -84.466,-32.6 MOD3.43@-84.466,-30.9
3V3_0: C26.1 CN6.4 L13.2 | length 20.6
  Top Layer w0.178: CN6.4@-127.766,61.66 CN6.4@-126.9,61.66 ; CN6.4@-126.9,61.68 -124.82,61.68 -123.889,60.75 C26.1@-115.666,60.75 ; C26.1@-114.777,60.75 -113.942,60.75 -111.488,63.204 L13.2@-107.677,63.204
3V3_1: C18.1 CN14.4 L2.2 | length 20.7
  Top Layer w0.178: CN14.4@-50.566,61.66 CN14.4@-49.9,61.66 ; CN14.4@-49.9,61.68 -40.543,61.68 -39.613,60.75 C18.1@-37.798,60.75 ; C18.1@-37.248,60.6 -34.664,63.184 L2.2@-30.723,63.184
3V3_2: C1.1 CN19.4 L4.2 | length 19.7
  Top Layer w0.178: CN19.4@-49.433,-20.425 -40.516,-20.425 -39.627,-20.425 C1.1@-38.477,-21.575 ; C1.1@-37.727,-21.5 -37.027,-21.5 -34.677,-19.15 L4.2@-30.477,-19.15
3V3_LEFT: L2.1 L4.1 L5.1 L6.1 MOD3.73 | length 186.4
  Top Layer w0.178: L2.1@-29.448,63 v1(-27.398,63) ; L4.1@-29.277,-19.2 v1(-27.227,-19.2) -25.87,-20.557 L5.1@-25.87,-22.352 ; L6.1@-25.616,59.944 -25.616,61.218
  Top Layer w0.381: v1(-27.398,63) -25.616,61.218
  Top Layer w0.508: MOD3.73@-71.216,-3.63 -69.073,-3.63 v1(-68.528,-4.175) ; v1(6.17,33.2) v1(6.17,63.204)
  Bottom Layer w0.508: v1(-68.528,-4.175) -66.753,-5.95 -27.98,-5.95 6.17,28.2 v1(6.17,33.2) ; -28.091,-5.95 -28.091,-18.336 v1(-27.227,-19.2) ; v1(-27.398,63) 5.862,63 6.118,63.256 v1@6.118,63.152
3V3_RIGHT: L12.1 L13.1 MOD3.12 | length 140
  Top Layer w0.178: L13.1@-106.402,63.1 v1(-104.352,63.1) ; v1@-105.105,-7.317 MOD3.12@-102.695,-7.317 ; -102.616,61.341 -102.616,59.982 L12.1@-102.578,59.944
  Top Layer w0.508: v1(-124.892,10.744) -124.892,11.227 -134.93,21.265 -134.93,62.047 -125.857,71.12 -109.093,71.12 -104.352,66.379 v1(-104.352,63.1) -102.616,61.364
  Bottom Layer w0.508: v1@-124.968,10.668 -124.968,-5.309 -122.919,-7.357 v1(-105.145,-7.357)
5V: C3.1 L1.1 L8.1 L9.1 L10.1 L11.1 L16.1 MOD3.26 U11.D2 | length 357.4
  Top Layer w0.178: L8.1@-115.08,51.454 -114.827,51.454 -113.728,50.355 ; -104.666,-25.2 -102.666,-25.2 MOD3.26@-102.566,-25.3 ; -102.616,56.134 -102.578,56.172 L1.1@-102.578,57.658 ; L10.1@-37.58,-30.48 -37.58,-29.452 v1(-36.576,-28.448) ; L9.1@-37.341,51.5 -37.341,52.829 -37.3,52.87 ; L16.1@-25.87,-24.638 -25.87,-25.946 -25.781,-26.035 ; -25.654,56.134 L11.1@-25.654,57.277
  Top Layer w0.508: v1(-104.559,-43.904) -104.559,-36.03 -106.934,-33.655 -106.934,-31.877 -105.537,-30.48 -105.537,-26.071 -104.666,-25.2 -112.014,-17.852 -112.014,-17.018 -113.919,-15.113 -113.919,3.937 -131.826,21.844 -132.279,21.844 -132.969,22.534 -132.969,41.402 -126.111,48.26 -115.824,48.26 -107.95,56.134 -102.616,56.134 -100.965,56.134 -95.25,61.849 ; -95.25,62.865 -95.25,61.849 ; v1(-36.576,-28.448) -28.194,-28.448 -25.781,-26.035 ; -25.654,56.134 -25.908,56.134 -25.964,56.078 -25.98,56.078 -26.441,55.617 -26.441,55.601 -27.686,54.356 -35.814,54.356 -37.3,52.87 -41.834,57.404 -48.26,57.404 -48.756,57.9 -58.154,57.9 -70.73,70.476 -70.73,80.636 -75.565,85.471 -78.232,85.471 -95.25,68.453 -95.25,61.849
  Bottom Layer w0.508: v1@-104.648,-43.942 -104.521,-43.815 v1(-103.124,-43.815) -99.441,-47.498 -45.974,-47.498 -36.601,-38.125 v1@-36.601,-28.448
ASDO: D3.4 MOD3.49 R8.2 S3.2 U13.50 | length 74.1
  Top Layer w0.178: U13.50@-117.319,-20.867 -116.441,-20.867 -115.951,-20.377 v1(-115.951,-19.05) v1@-115.951,-18.775 ; v1(-88.265,-35.89) -87.755,-36.4 R8.2@-86.566,-36.4 -86.566,-37.821 -86.091,-38.296 D3.4@-86.091,-39.031 -85.353,-39.031 -84.434,-39.95 S3.2@-83.516,-39.95 ; S3.2@-83.466,-48.1 S3.2@-83.466,-39.8 ; MOD3.49@-76.866,-31.04 v1(-76.866,-29.1)
  Bottom Layer w0.178: v1(-115.951,-19.05) -117.221,-19.05 -117.729,-19.558 -117.729,-20.574 -115.316,-22.987 -109.22,-22.987 -96.317,-35.89 v1(-88.265,-35.89) -82.625,-30.25 -78.016,-30.25 v1(-76.866,-29.1)
B1_00: MOD3.44 U3.6 | length 26.8
  Top Layer w0.178: MOD3.44@-83.266,-31 -83.166,-31.1 -83.166,-33.623 -80.139,-36.65 U3.6@-60.266,-36.65
B1_01: MOD3.48 U3.4 | length 20.5
  Top Layer w0.178: MOD3.48@-78.166,-31.1 -78.166,-32.553 -75.368,-35.35 U3.4@-60.266,-35.35
B1_03: MOD3.52 U3.1 | length 14.6
  Top Layer w0.178: MOD3.52@-73.046,-31.05 -73.046,-32.42 -72.066,-33.4 U3.1@-60.266,-33.4
B1_04: MOD3.53 U4.8 | length 24.9
  Top Layer w0.178: MOD3.53@-71.216,-29.03 -69.035,-29.03 -64.389,-24.384 -64.389,-13.564 -61.471,-10.646 U4.8@-60.266,-10.646
B1_05: MOD3.54 U4.6 | length 24.7
  Top Layer w0.178: MOD3.54@-71.216,-27.76 -69.786,-27.76 -65.659,-23.633 -65.659,-13.233 -61.772,-9.346 U4.6@-60.266,-9.346
B1_06: MOD3.56 U4.4 | length 24
  Top Layer w0.178: MOD3.56@-71.216,-25.22 -68.864,-25.22 -66.916,-23.272 -66.916,-13.106 -61.856,-8.046 U4.4@-60.266,-8.046
B1_07: MOD3.57 U4.1 | length 23.8
  Top Layer w0.178: MOD3.57@-71.216,-23.95 -69.58,-23.95 -68.199,-22.569 -68.199,-13.233 U4.1@-61.062,-6.096
  Top Layer w0.203: U4.1@-61.062,-6.096 U4.1@-60.266,-6.096
B1_10: MOD3.64 U5.9 | length 32
  Top Layer w0.178: MOD3.64@-71.216,-15.06 -70.534,-15.06 -69.67,-14.197 -69.67,-13.48 -57.527,-1.337 -57.527,0.317 -62.281,5.071 -62.281,7.068 -61.879,7.47 U5.9@-60.616,7.47
B1_11: MOD3.65 U5.8 | length 31.3
  Top Layer w0.178: MOD3.65@-71.216,-13.79 -70.483,-13.79 -57.882,-1.189 -57.882,0.169 -62.636,4.924 -62.636,7.215 -61.732,8.12 U5.8@-60.616,8.12
B2_12: MOD3.76 U5.6 | length 15.9
  Top Layer w0.178: MOD3.76@-71.247,0.203 -69.621,0.203 -66.218,3.607 -66.218,4.902 -61.7,9.42 U5.6@-60.616,9.42 ; MOD3.76@-71.216,0.18 MOD3.76@-70.501,0.18
B2_13: MOD3.77 U5.5 | length 14.3
  Top Layer w0.178: MOD3.77@-71.216,1.45 -70.458,1.45 -68.11,3.797 -68.11,4.102 -62.142,10.07 U5.5@-60.616,10.07
B2_14: MOD3.80 U5.3 | length 13.2
  Top Layer w0.178: MOD3.80@-71.216,5.26 -68.984,5.26 -62.837,11.407 -60.653,11.407 U5.3@-60.616,11.37
B2_15: MOD3.81 U5.1 | length 13.1
  Top Layer w0.178: MOD3.81@-71.216,6.53 -69.619,6.53 -63.479,12.67 U5.1@-60.616,12.67
B2_16: MOD3.82 U6.9 | length 10.6
  Top Layer w0.178: MOD3.82@-73.046,8.55 -73.046,9.259 U6.9@-66.085,16.219
B2_17: MOD3.83 U6.7 | length 12
  Top Layer w0.178: MOD3.83@-74.316,8.55 -74.316,10.545 -72.593,12.268 -71.882,12.268 U6.7@-67.008,17.142
B2_18: MOD3.85 U6.5 | length 13.9
  Top Layer w0.178: MOD3.85@-76.856,8.55 -76.856,10.31 -73.831,13.335 -72.654,13.335 U6.5@-67.928,18.061
B2_19: MOD3.86 U13.56 | length 69.6
  Top Layer w0.178: U13.56@-119.669,-19.717 -119.669,-18.796 -119.189,-18.317 -119.189,-15.817 -120.371,-14.636 -120.371,-10.592 -120.726,-10.236 -120.726,-7.264 -120.371,-6.909 -120.371,0.305 -119.253,1.422 v1(-119.253,1.905) ; v1(-85.725,1.143) -85.725,2.388 -82.017,6.096 -79.959,6.096 -78.126,7.929 MOD3.86@-78.126,8.55
  Bottom Layer w0.178: v1(-119.253,1.905) -118.11,3.048 -87.63,3.048 v1(-85.725,1.143)
B2_20: MOD3.87 U13.55 | length 66.2
  Top Layer w0.178: U13.55@-119.269,-19.717 -119.269,-18.899 -118.821,-18.452 -118.821,-15.683 -119.583,-14.921 -119.583,-10.135 -120.015,-9.703 -120.015,-7.696 -119.532,-7.214 -119.532,-0.279 v1(-118.11,1.143) ; v1@-87.147,0.787 -87.147,1.499 -82.194,6.452 -80.797,6.452 -79.396,7.853 MOD3.87@-79.396,8.55
  Bottom Layer w0.178: v1(-118.11,1.143) -116.967,2.286 -88.519,2.286 v1(-87.122,0.889)
B2_21: MOD3.89 U13.54 | length 61.2
  Top Layer w0.178: U13.54@-118.869,-19.717 -118.869,-19.002 -118.466,-18.599 -118.466,-15.38 -118.745,-15.101 -118.745,-9.804 -119.278,-9.271 -119.278,-7.976 -118.618,-7.315 -118.618,-1.27 v1(-116.967,0.381)
  Top Layer w0.203: v1@-88.29,0.813 -88.519,1.041 -88.519,1.341 -81.936,7.924 MOD3.89@-81.936,8.55
  Bottom Layer w0.178: v1(-116.967,0.381) -115.988,1.36 -115.392,1.36
  Bottom Layer w0.203: -115.392,1.36 -88.99,1.36 v1(-88.519,0.889)
B2_22: MOD3.90 U13.53 | length 57.7
  Top Layer w0.178: U13.53@-118.469,-19.717 -118.469,-19.105 -118.008,-18.645 -118.008,-9.449 -118.364,-9.093 -118.364,-8.128 -117.736,-7.5 -117.736,-2.293 v1(-115.824,-0.381)
  Top Layer w0.203: v1(-90.449,0.102) -83.206,7.345 MOD3.90@-83.206,8.55
  Bottom Layer w0.178: v1(-115.824,-0.381) -115.341,0.102 v1(-90.449,0.102)
B2_CLKIN: CN9.1 MOD3.71 R22.2 | length 11
  Top Layer w0.178: MOD3.71@-71.216,-6.17 -69.671,-6.17 -69.5,-6 -68.591,-6 -62.941,-0.35 CN9.1@-62.651,-0.35
B3_2V5_23_PLL1_N: MOD3.92 U6.4 | length 22.6
  Top Layer w0.178: MOD3.92@-85.746,8.55 -85.746,10.42 -79.341,16.825 -70.083,16.825 U6.4@-68.387,18.521
B3_2V5_24_PLL1_P: MOD3.93 U7.8 | length 16.3
  Top Layer w0.178: MOD3.93@-87.016,8.55 -87.016,10.565 U7.8@-76.899,20.682
B4_2V5_27_PLL4_N: MOD3.100 U7.3 | length 23.1
  Top Layer w0.178: MOD3.100@-95.906,8.55 -95.906,9.235 -94.05,11.091 -92.314,11.091 -92.115,11.29 -92.115,11.293 -87.569,15.84 -86.665,15.84 -80.23,22.275 -79.903,22.275 U7.3@-79.197,22.981
B4_2V5_28_PLL4_P: CN10.1 MOD3.101 U7.1 | length 25.6
  Top Layer w0.178: MOD3.101@-97.176,8.55 -97.125,8.601 -97.125,12.316 -91.166,18.275 -86.337,18.275 -81.412,23.2 -80.819,23.2 U7.1@-80.119,23.9
B5_25: MOD3.97 U7.6 | length 19.5
  Top Layer w0.178: MOD3.97@-92.189,9.182 -88.57,12.802 -86.968,12.802 -78.929,20.841 -78.579,20.841 U7.6@-77.818,21.602
B5_26: MOD3.98 U7.5 | length 21.1
  Top Layer w0.178: MOD3.98@-93.366,8.55 -93.366,9.275 -92.774,9.866 -92.038,9.866 -87.255,14.65 -85.695,14.65 -79.097,21.247 -79.092,21.247 U7.5@-78.278,22.061
B5_29_8P: MOD3.103 U8.9 | length 22.4
  Top Layer w0.178: MOD3.103@-99.716,8.55 -99.716,15.712 -93.859,21.569 -88.342,21.569 U8.9@-87.339,22.573
B5_30_8N: MOD3.104 U8.8 | length 23
  Top Layer w0.178: MOD3.104@-100.986,8.55 -101.08,8.644 -101.08,14.887 -94.017,21.95 -88.881,21.95 U8.8@-87.799,23.032
B5_31_9P: MOD3.1 U8.6 | length 25.7
  Top Layer w0.178: MOD3.1@-102.566,6.53 -102.566,14.479 -94.064,22.981 -89.689,22.981 U8.6@-88.718,23.952
B5_32_9N: MOD3.2 U8.5 | length 28.7
  Top Layer w0.178: MOD3.2@-102.816,5.26 -103.526,5.26 -104.171,5.905 -104.171,13.413 -94.222,23.362 -90.227,23.362 U8.5@-89.178,24.411
B5_33: MOD3.4 U8.3 | length 32.2
  Top Layer w0.178: MOD3.4@-102.816,2.72 -104.022,2.72 -104.938,3.635 -104.938,13.723 -93.961,24.7 -90.728,24.7 U8.3@-90.097,25.331
B5_34: MOD3.5 U8.1 | length 33.3
  Top Layer w0.178: MOD3.5@-102.816,1.45 -103.491,1.45 -105.319,3.278 -105.319,13.881 -94.094,25.106 -92.16,25.106 U8.1@-91.016,26.25
B5_35_10N: MOD3.7 U9.9 | length 23.5
  Top Layer w0.178: U9.9@-107.155,19.731 -107.166,19.72 -107.166,19.22 -107.145,19.198 -107.145,18.651 -107.166,18.63 -107.166,8.126 -106.705,7.666 -106.705,1.339 -104.276,-1.09 MOD3.7@-102.816,-1.09
B5_36_10P: MOD3.8 U9.7 | length 25.7
  Top Layer w0.178: U9.7@-108.466,19.75 -108.466,8.42 -107.417,7.371 -107.417,0.128 -104.929,-2.36 MOD3.8@-102.816,-2.36
B5_37_11N: MOD3.15 U9.5 | length 35.7
  Top Layer w0.178: -109.78,17.581 -109.78,17.709 -109.766,17.723 -109.766,18.452 -109.84,18.526 -109.84,19.073 -109.766,19.148 U9.5@-109.766,20.2 ; -109.766,17.581 -109.59,17.405 -109.59,8.539 -108.128,7.076 -108.128,-8.171 -105.299,-11 -104.554,-11 -104.304,-11.25 MOD3.15@-102.816,-11.25
B5_38_11P: MOD3.16 U9.3 | length 37.7
  Top Layer w0.178: U9.3@-111.066,20.2 -111.066,19.214 -111.18,19.1 -111.18,18.412 -111.066,18.298 -111.066,9.009 -108.839,6.782 -108.839,-8.941 -105.26,-12.52 MOD3.16@-102.816,-12.52
B5_40_12N: MOD3.20 U10.9 | length 43.9
  Top Layer w0.178: U10.9@-115.166,20.2 -115.166,19.339 -115.005,19.178 -115.005,17.539 -113.8,16.334 -113.8,8.555 -110.884,5.639 -110.884,-11.282 -105.137,-17.029 -104.171,-17.029 -103.599,-17.6 MOD3.20@-102.816,-17.6
B5_41_12P: MOD3.21 U10.7 | length 46.1
  Top Layer w0.178: U10.7@-116.466,20.2 -116.466,17.6 -115.705,16.839 -115.705,9.335 -111.595,5.225 -111.595,-12.367 -105.092,-18.87 MOD3.21@-102.816,-18.87
B5_42: MOD3.23 U10.5 | length 48.7
  Top Layer w0.178: U10.5@-117.766,20.2 -117.79,20.176 -117.79,19.099 -117.815,19.073 -117.815,16.249 -117.094,15.528 -117.094,9.647 -112.306,4.859 -112.306,-13.467 -104.873,-20.9 -104.711,-20.9 -104.201,-21.41 MOD3.23@-102.816,-21.41
B5_43: MOD3.24 U10.4 | length 50.6
  Top Layer w0.178: U10.4@-118.43,20.3 -118.43,9.905 -113.017,4.492 -113.017,-14.486 -104.823,-22.68 MOD3.24@-102.816,-22.68
B5_CLKIN_N: MOD3.11 U13.48 | length 30.1
  Top Layer w0.178: U13.48@-117.319,-21.667 -116.236,-21.667 -114.91,-20.341 -114.91,-15.9 -115.811,-14.999 -115.811,-11.722 -115.189,-11.1 v1(-115.189,-6.17) ; v1(-104.595,-6.17) MOD3.11@-102.816,-6.17
  Bottom Layer w0.178: v1(-115.189,-6.17) v1(-104.595,-6.17)
B5_CLKIN_P: MOD3.10 U13.49 | length 31.2
  Top Layer w0.178: U13.49@-117.319,-21.267 -116.339,-21.267 -115.265,-20.194 -115.265,-16.18 -116.167,-15.278 -116.167,-11.443 -115.545,-10.82 -115.545,-7.366 -115.849,-7.061 -115.849,-5.561 v1(-115.189,-4.9) ; v1(-104.595,-4.9) MOD3.10@-102.816,-4.9
  Bottom Layer w0.178: v1(-115.189,-4.9) v1(-104.595,-4.9)
B6_39_NCEO: MOD3.18 U9.1 | length 41
  Top Layer w0.178: U9.1@-112.366,20.2 -112.366,19.192 -112.514,19.044 -112.514,18.476 -112.366,18.329 -112.366,8.199 -110.109,5.942 -110.109,-10.663 -105.712,-15.06 MOD3.18@-102.816,-15.06
CONF_DONE: MOD3.17 U13.47 | length 25.7
  Top Layer w0.178: U13.47@-117.319,-22.067 -116.133,-22.067 -114.554,-20.488 -114.554,-15.753 -115.189,-15.118 -115.189,-14.732 v1@-115.316,-14.605 ; MOD3.17@-102.816,-13.79 -102.801,-13.775 v1(-101.025,-13.775)
  Bottom Layer w0.178: v1@-114.935,-14.605 -101.855,-14.605 v1(-101.025,-13.775)
  other v1: -115.189,-14.605
DATA0: MOD3.62 U13.65 | length 59.7
  Top Layer w0.178: -124.714,-15.748 -124.714,-16.49 -123.269,-17.935 U13.65@-123.269,-19.717 ; v1(-73.066,-17.6) MOD3.62@-71.216,-17.6
  Bottom Layer w0.178: v1@-124.714,-15.494 -124.587,-15.367 -117.221,-15.367 -116.967,-15.621 -104.005,-15.621 -101.215,-18.412 -73.877,-18.412 v1(-73.066,-17.6)
  other v1: -124.714,-15.367
DCLK: D3.1 MOD3.59 R7.2 S2.2 U13.51 | length 78.4
  Top Layer w0.178: U13.51@-117.319,-20.467 -116.989,-20.467 v1@-116.605,-20.083 ; S2.2@-90.216,-48.25 S2.2@-90.216,-39.95 ; S2.2@-89.704,-40.462 -88.798,-40.462 -88.129,-41.131 D3.1@-87.391,-41.131 -87.391,-40.119 -86.922,-39.649 -86.922,-38.148 -88.976,-36.093 -88.976,-35.027 -88.29,-34.341 -88.29,-34.325 v1(-88.266,-34.3) R7.2@-86.566,-34.3 ; v1(-76.835,-22.885) -75.35,-21.4 -71.226,-21.4 MOD3.59@-71.216,-21.41
  Bottom Layer w0.178: v1@-116.84,-20.147 -116.661,-20.147 -115.726,-21.082 -108.839,-21.082 -95.621,-34.3 v1(-88.266,-34.3) v1@-76.894,-22.928
  other v1: -116.722,-20.086